# Altium PCB microphone_DIY.PcbDoc
Units mm, origin at the board's own origin, x right, y up, seen from the top; angles counter-clockwise.
Board outline 43 x 43 mm, 2 copper layers (Top Layer, Bottom Layer); 36 components, 27 nets, 131 pads, 35 vias.
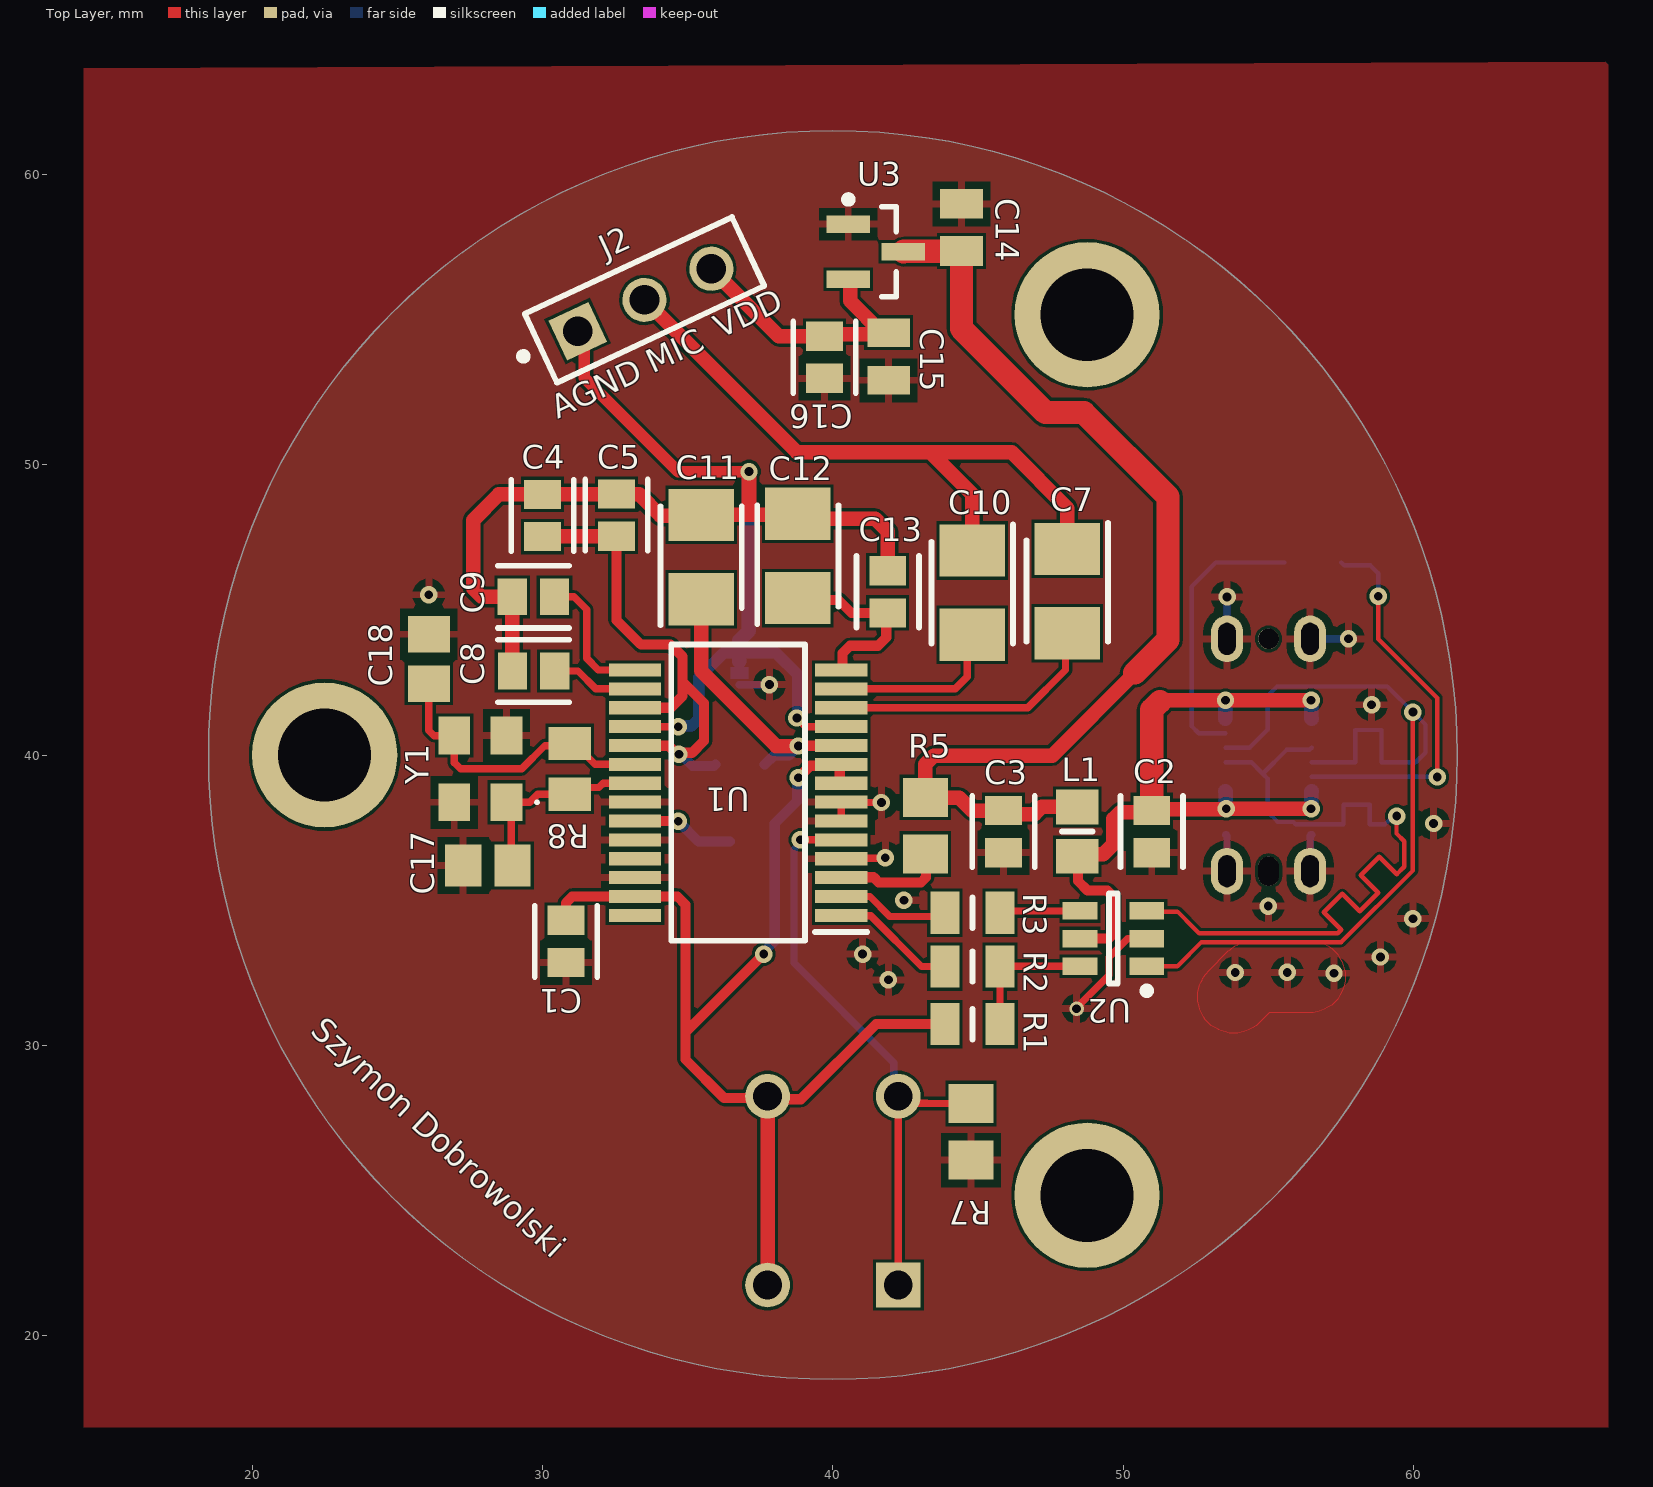
[diagram p0: Top Layer view]
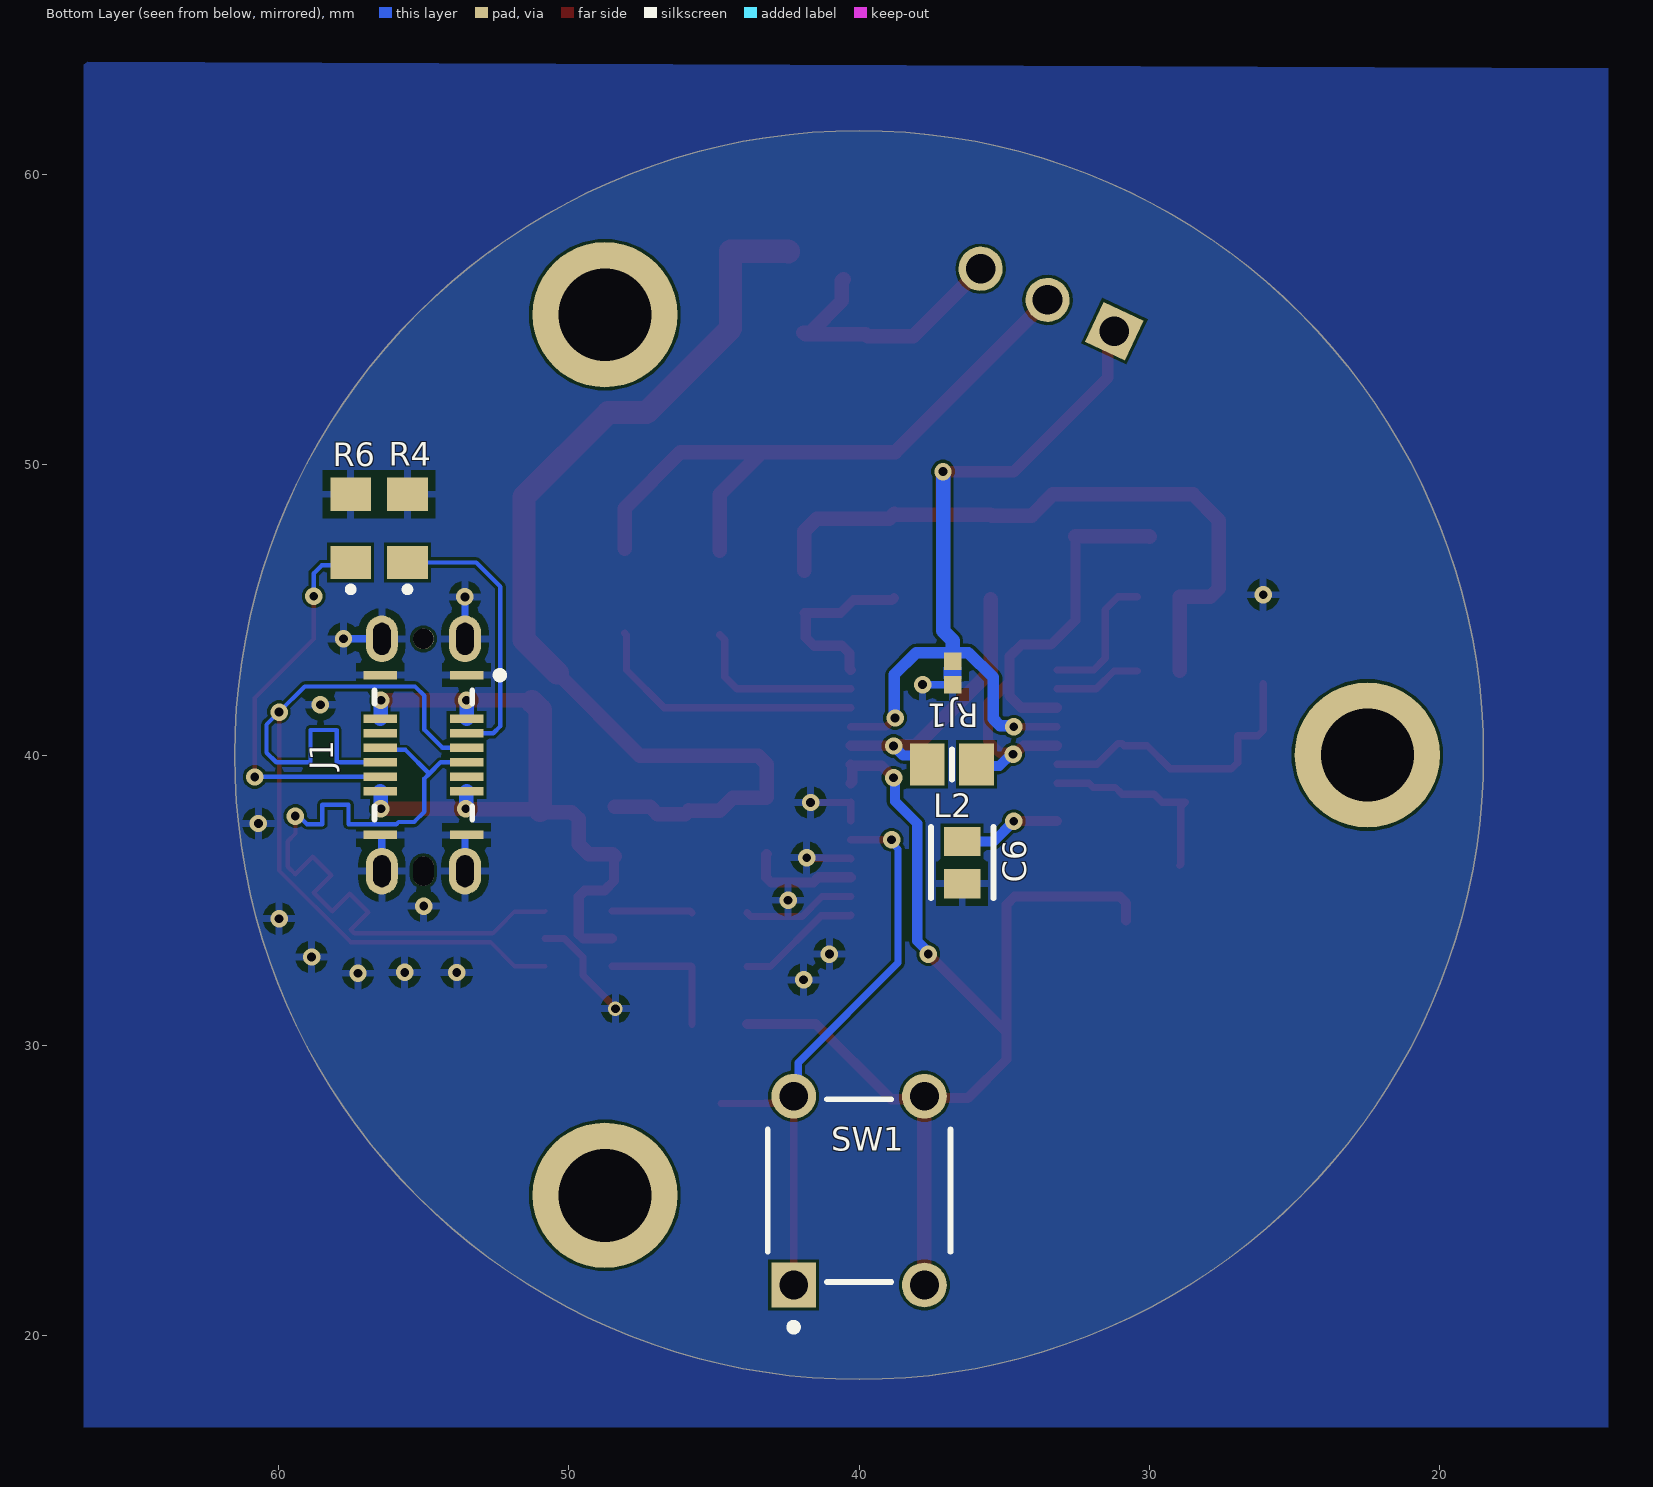
[diagram p1: Bottom Layer view, seen from below]
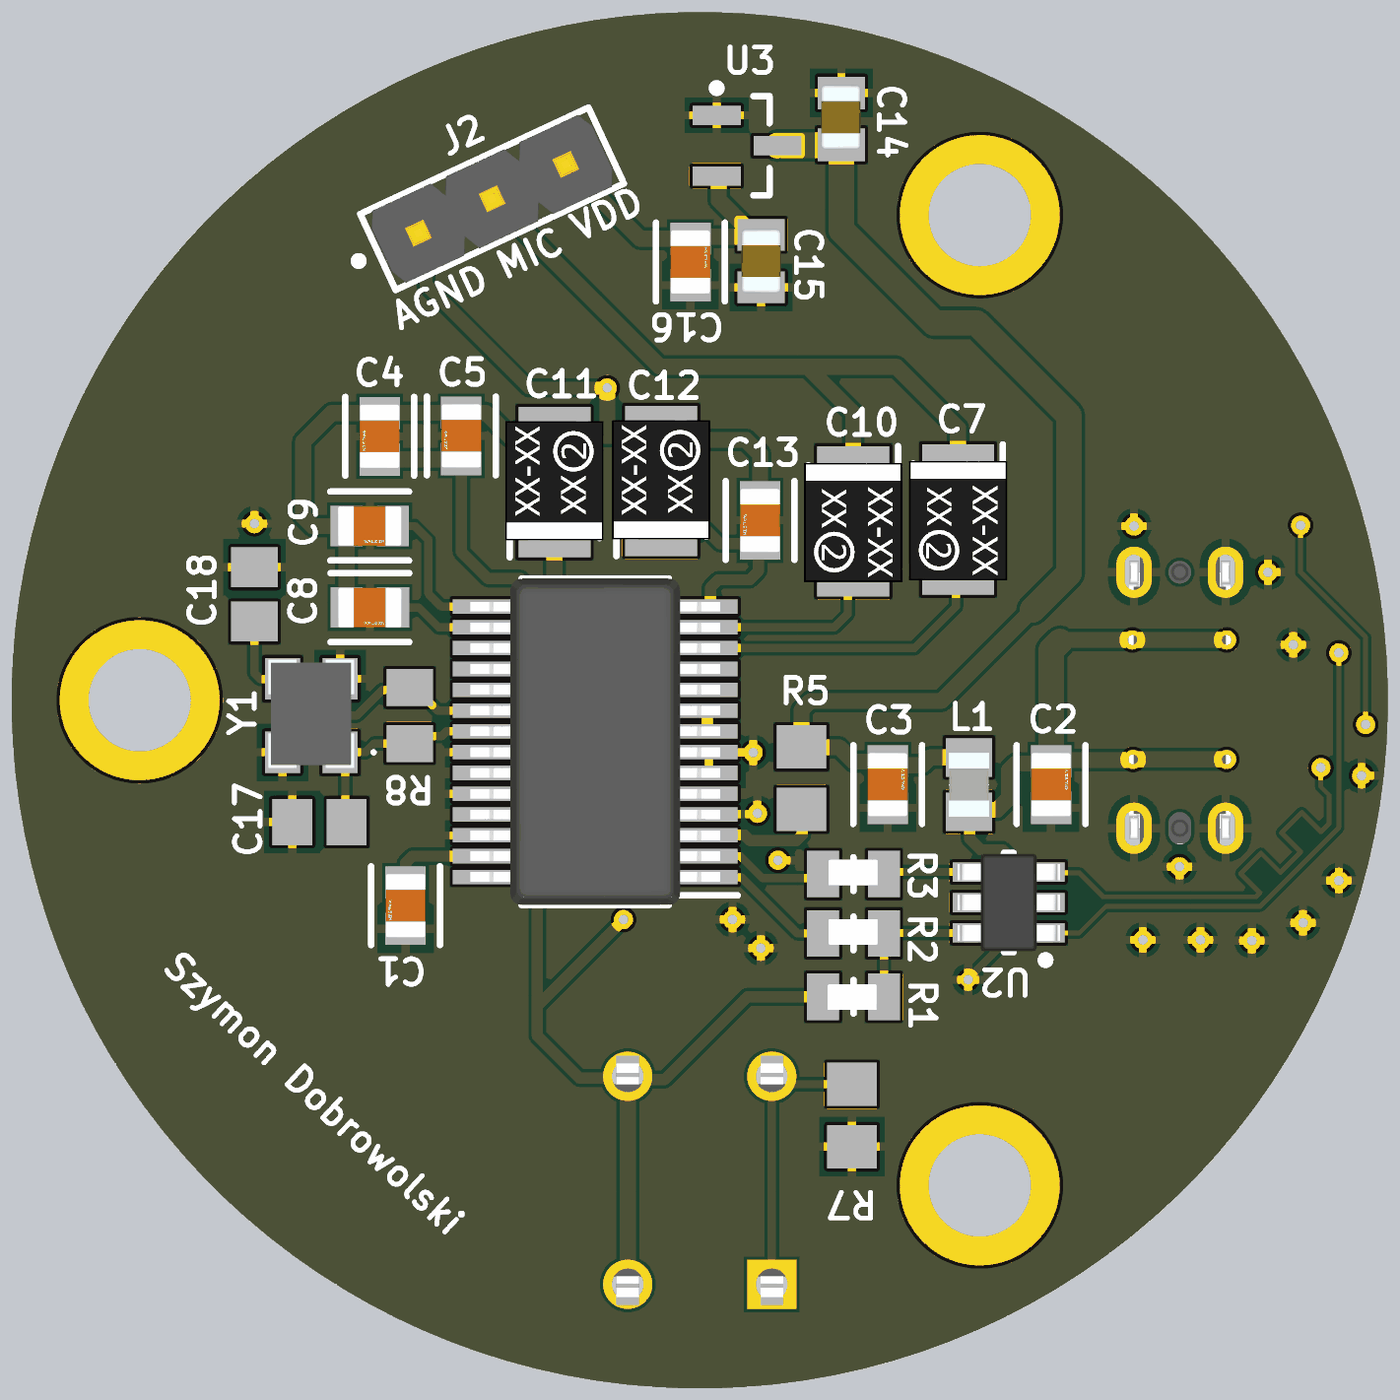
[diagram p2: 3D render of the assembled board from above, using the file's embedded part models]
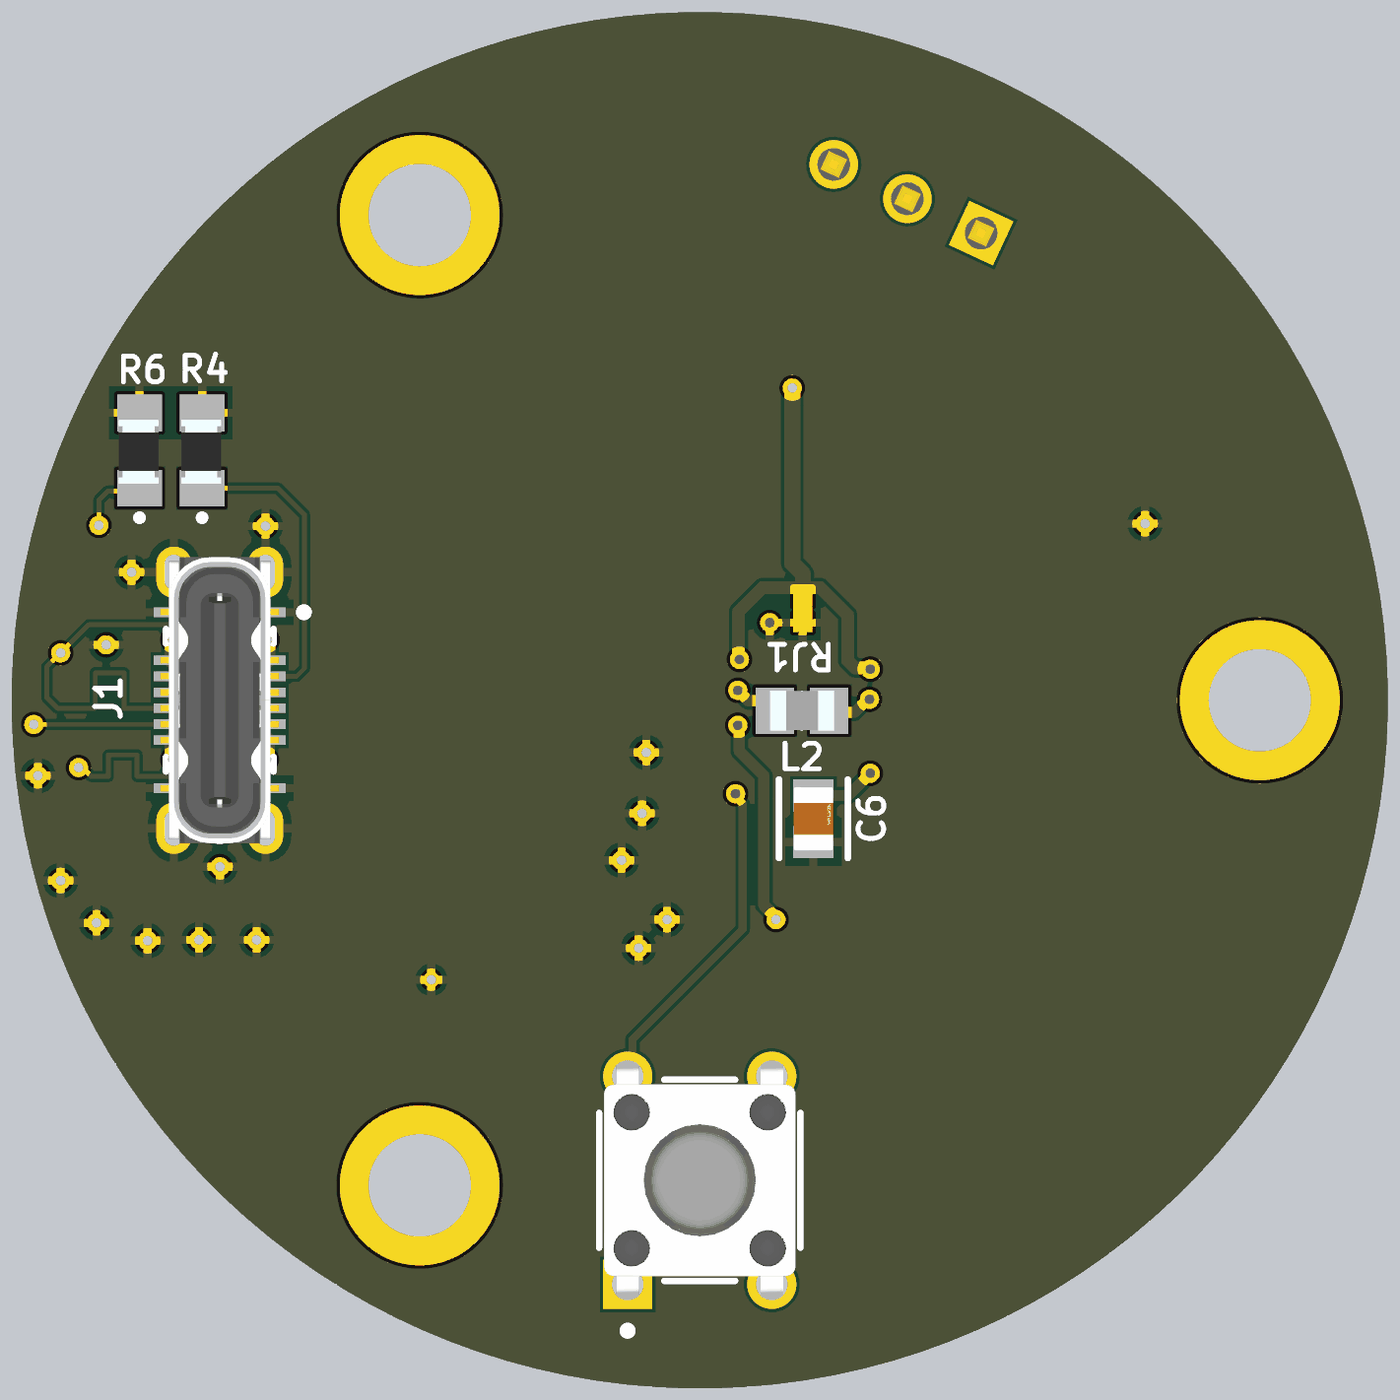
[diagram p3: 3D render of the assembled board from below, using the file's embedded part models]

## Layer stack, top to bottom
Top Solder: solder mask 0.0102, Solder Resist, Dk 3.5
Top Layer: signal copper 0.0356
Dielectric 1: dielectric 0.32, FR-4, Dk 4.8
Bottom Layer: signal copper 0.0356
Bottom Solder: solder mask 0.0102, Solder Resist, Dk 3.5

## Board outline
40,18.5 cw(c40,40) 18.5,40 cw(c40,40) 40,61.5 cw(c40,40) 61.5,40 cw(c40,40)

## Design rules (kind name [scope] priority, off if disabled: settings)
Clearance [All] p1: gap=0.1 ignorepadtopadclearanceinfootprint=TRUE
ComponentClearance [All] p1: gap=0.2 collisioncheckmode=3 verticalgap=0.2 showdistances=FALSE checkcomponentboundary=TRUE
DiffPairsRouting [InDifferentialPairClass('USB')] p1: maxlimit=0.254 minlimit=0.15 mostfreqgap=0.15 toplayer_minwidth=0.15 toplayer_maxwidth=0.25 toplayer_prefwidth=0.25 bottomlayer_minwidth=0.15 bottomlayer_maxwidth=0.25 bottomlayer_prefwidth=0.25 maxuncoupledlength=4
HoleSize [All] p1: absolutevalues=TRUE maxlimit=5.54 minlimit=0.01 maxpercent=80.000 minpercent=20.000
HoleToHoleClearance [All] p1: gap=0.01 allowstackedmicrovias=TRUE
MatchedLengths [InxSignalClass('All xSignals')] p1: tolerance=0.1 checknetsindiffpair=FALSE checkdiffpairvsdiffpair=TRUE checkxsignals=TRUE checkothers=TRUE usedelayunits=TRUE delaytolerance=10.000000 targetsourcename=USB_P-PCM_P-D_P_PP1
MinimumSolderMaskSliver [All] p1: minsoldermaskwidth=0.01
PolygonConnect [All] p1: connectstyle=Relief reliefconductorwidth=0.254 reliefentries=4 polygonreliefangle="90 Angle" airgapwidth=0.254
RoutingVias [All] p1: holewidth=0.3 width=0.5 viastyle="Through Hole" minholewidth=0.3 minwidth=0.45 maxholewidth=0.3 maxwidth=0.6
SilkToSilkClearance [All] p1: silktosilkclearance=0.01
SilkToSolderMaskClearance [IsPad] p1: minsilkscreentomaskgap=0.1 clearancetoexposedcopper=TRUE
SolderMaskExpansion [All] p1: expansion=0.102 istentingtop=FALSE
SupplyNets "Schematic Supply Nets_1" [InNet('GND')] p1: voltage=0.000
Width USB [InNetClass('USB')] p1: maxlimit=0.254 minlimit=0.15 preferedwidth=0.254
Width AUDIO [InNetClass('ANALOG')] p2: maxlimit=0.5 minlimit=0.254 preferedwidth=0.4 minimp=50.000000 maximp=50.000000 favimp=50.000000
Width PWR [InNetClass('PWR')] p3: maxlimit=0.8 minlimit=0.35 preferedwidth=0.5 minimp=50.000000 maximp=50.000000 favimp=50.000000
Width [All] p4: maxlimit=0.254 minlimit=0.15 preferedwidth=0.254 minimp=50.000000 maximp=50.000000 favimp=50.000000
23 further rules are at their usual default settings.

## Classes and differential pairs
differential pair class USB: D PCM USB
net class USB: D_N D_P PCM_N PCM_P USB_N USB_P
net class ANALOG: AGNDC NetC7_1 VINL VINR
net class PWR: LDO_OUT NetR5_2 VBUS VBUS_ESD VCCCI VCCP1I VCCXI VCOM VDDI
differential pair PCM: +PCM_P -PCM_N
differential pair D: +D_P -D_N
differential pair USB: +USB_P -USB_N

## Components (designator, comment, footprint, x,y, rotation, side; value= is the part's Value field where it differs from the comment)
C1 "0805B104K500CT" FP-0805B-IPC_C 30.808,33.581 r270 top
C2 "0805B104K500CT" FP-0805B-IPC_C 50.978,37.363 r90 top
C3 "0805B104K500CT" FP-0805B-IPC_C 45.872,37.363 r90 top
C4 "0805B104K500CT" FP-0805B-IPC_C 29.999,48.248 r270 top
C5 "0805B104K500CT" FP-0805B-IPC_C 32.549,48.26 r270 top
C6 "0805B104K500CT" FP-0805B-IPC_C 36.449,36.297 r90 bottom
C7 "593D106X9016B2TE3" 593D106X9016B2TE3-Footprint-1 48.069,45.647 r270 top value=10µF
C8 "0805B104K500CT" FP-0805B-IPC_C 29.693,42.894 r0 top
C9 "0805B104K500CT" FP-0805B-IPC_C 29.687,45.444 r0 top
C10 "593D106X9016B2TE3" 593D106X9016B2TE3-Footprint-1 44.796,45.59 r270 top value=10µF
C11 "593D106X9016B2TE3" 593D106X9016B2TE3-Footprint-1 35.462,46.817 r90 top value=10µF
C12 "593D106X9016B2TE3" 593D106X9016B2TE3-Footprint-1 38.794,46.853 r90 top value=10µF
C13 "0805B104K500CT" FP-0805B-IPC_C 41.885,45.618 r270 top
C14 "08055C105KAT2A" 08055C105KAT2A-Footprint-1 44.425,58.166 r270 top value=1µF
C15 "0805B106K100CT" 0805B106K100CT-Footprint-1 41.92,53.723 r90 top value=10µF
C16 "0805B104K500CT" FP-0805B-IPC_C 39.708,53.696 r90 top
C17 "VJ0805A120JXACW1BC" CAPC2013X135X50NL15T20 28.118,36.195 r0 top
C18 "VJ0805A120JXACW1BC" CAPC2013X135X50NL15T20 26.086,43.307 r270 top
J1 "USB4145-03-0230-C" FP-USB4145-03-0230-C-MFG 55,40 r270 bottom locked
J2 "MTLW-103-07-G-S-230" FP-MTLW-103-07-G-S-230-MFG 33.511,55.67 r25 top
L1 "MPZ2012S601ATD25" MPZ2012S601ATD25-Footprint-1 48.412,37.363 r90 top value=1mH
L2 "MPZ2012S601ATD25" MPZ2012S601ATD25-Footprint-1 36.805,39.675 r180 bottom value=100
R1 "AR05BTCW1501" AR05BTCW1501-Footprint-1 44.806,30.734 r180 top value=1.5k
R2 "CPF0805B22RE1" 2-1614884-5-Footprint-1 44.803,32.716 r180 top value=22
R3 "CPF0805B22RE1" 2-1614884-5-Footprint-1 44.803,34.569 r180 top value=22
R4 "ERJP06F5101V" ERJP06F5101V-Footprint-1 55.55,47.803 r90 bottom value=5.1k
R5 "ERJ-6GEYJ2R2V" RESC2013X70X40ML20T20 43.18,37.567 r270 top
R6 "ERJP06F5101V" ERJP06F5101V-Footprint-1 57.506,47.803 r90 bottom value=5.1k
R7 "ERJ-6ENF1002V" RESC2013X70X40ML20T20 44.755,27.026 r90 top
R8 "ERJ-6GEYJ105V" RESC2013X70X40NL20T20 30.937,39.522 r90 top
RJ1 "Net Tie 12x8mil" SHORT06-FP 36.779,42.824 r90 bottom net-tie
SW1 "1-1825910-4" FP-1-1825910-4-MFG 40,25 r0 bottom locked
U1 "PCM2906CDB" PCM2906CDB-Footprint-1 36.734,38.703 r180 top
U2 "USBLC6-2SC6" STM-SOT23-6L_V 49.655,33.68 r180 top value=2.5pF
U3 "MCP1700T-3302E/TT" SOT-23-TT3_N 41.478,57.328 r0 top
Y1 "3225-12M-SR" 3225-12M-SR-Footprint-1 27.861,39.522 r90 top

## Footprints (in the part's own frame and the unit in brackets; to place one, negate y for a bottom-side part, rotate by r counter-clockwise, add the part's x,y. Pads: shape width x height; smd on the part's side, far side on the other; paste and mask are expansions set on the pad)
2-1614884-5-Footprint-1 [mm]
  rect 1x1.45 smd: 1(-0.95,0) 2(0.95,0)
  silkscreen extent 0,-0.53 0,0.53, body extent -0.77,-0.45 0.78,0.35, height 0.45
593D106X9016B2TE3-Footprint-1 [mm]
  rect 1.8x2.25 smd: 1(-1.45,0) 2(1.45,0)
  silkscreen extent -2.35,-1.4 1.75,1.4, body extent -1.83,-1.54 1.91,1.54, height 2.15
0805B106K100CT-Footprint-1 [mm]
  rect 0.99x1.47 smd: 1(-0.82,0) 2(0.82,0)
  body extent -1,-0.63 1,0.63, height 1.45
3225-12M-SR-Footprint-1 [mm]
  rect 1.3x1.1 smd: 1(-1.15,-0.9) 2(1.15,-0.9) 3(1.15,0.9) 4(-1.15,0.9)
  silkscreen extent -1.2,-2 -1.1,-1.9, body extent -1.64,-1.34 1.74,1.34, height 0.8
08055C105KAT2A-Footprint-1 [mm]
  rect 1.02x1.47 smd: 1(-0.81,0) 2(0.81,0)
  body extent -1.06,-0.64 0.95,0.61, height 1.4
AR05BTCW1501-Footprint-1 [mm]
  rect 1x1.45 smd: 1(-0.95,0) 2(0.95,0)
  silkscreen extent 0,-0.53 0,0.53, body extent -0.73,-0.39 0.82,0.41, height 0.45
CAPC2013X135X50NL15T20 [mm] "Chip Capacitor, 2-Leads, Body 2.00x1.25mm, IPC Medium Density"
  rect 1.25x1.45 smd: 1(-0.85,0) 2(0.85,0)
  body extent -1.08,-0.7 1.07,0.7, height 1.35
ERJP06F5101V-Footprint-1 [mm]
  rect 1.15x1.4 smd: 1(-1.175,0) 2(1.175,0)
  silkscreen extent -2.2,-0.1 -2,0.1, body extent -1.04,-0.59 0.96,0.66, height 0.6
FP-1-1825910-4-MFG [mm]
  rect 1.54x1.54 hole 0.99 paste-2539.97 mask+0: 1(2.25,3.25)
  round 1.54 hole 0.99 paste-2539.97 mask+0: 2(2.25,-3.25) 3(-2.25,3.25) 4(-2.25,-3.25)
  silkscreen extent -3.15,-3.15 3.15,4.82, body extent -3,-3.9 3,3.9, height 9.8
FP-0805B-IPC_C [mm]
  rect 1.006x1.262 smd paste+0 mask+0: 1(-0.726,0) 2(0.726,0)
  silkscreen extent -1.23,-1.07 1.23,1.07, body extent -1.33,-0.77 1.33,0.77, height 0.25
FP-MTLW-103-07-G-S-230-MFG [mm]
  rect 1.52x1.52 hole 1.02 paste-2539.97 mask+0: 1(-2.54,0)
  round 1.52 hole 1.02 paste-2539.97 mask+0: 2(0,0) 3(2.54,0)
  silkscreen extent -4.72,-1.31 3.94,1.31, body extent -4.04,-1.41 4.04,1.41, height 0.25
FP-USB4145-03-0230-C-MFG [mm]
  rrect100% 1.6x1.1 hole 0.6 slot 1.1 at 0 deg paste-2539.97 mask+0: 1(-4,1.43) 2(4,1.43) 3(-4,-1.43) 4(4,-1.43)
  rect 0.3x1.15 smd paste+0 mask+0: A1(-2.75,1.485) A4(-1.25,1.485) A5(-0.75,1.485) A6(-0.25,1.485) A7(0.25,1.485) A8(0.75,1.485) A9(1.25,1.485) A12(2.75,1.485) B1(2.75,-1.485) B4(1.25,-1.485) B5(0.75,-1.485) B6(0.25,-1.485) B7(-0.25,-1.485) B8(-0.75,-1.485) B9(-1.25,-1.485) B12(-2.75,-1.485)
  round 0.71 hole 0.71 unplated paste-2539.97 mask+0: ""(-4,0)
  rrect100% 1.01x0.71 hole 0.71 slot 1.01 at 0 deg unplated paste-2539.97 mask+0: ""(4,0)
  silkscreen extent -2.87,-1.68 2.22,2.75, body extent -4.48,-1.85 4.47,1.84, height 7.66
MPZ2012S601ATD25-Footprint-1 [mm]
  rect 1.2x1.45 smd: 1(-0.85,0) 2(0.85,0)
  silkscreen extent 0,-0.53 0,0.53, body extent -1,-0.63 1,0.63, height 1.05
PCM2906CDB-Footprint-1 [mm]
  rect 1.8x0.45 smd: 1(-3.55,4.225) 2(-3.55,3.575) 3(-3.55,2.925) 4(-3.55,2.275) 5(-3.55,1.625) 6(-3.55,0.975) 7(-3.55,0.325) 8(-3.55,-0.325) 9(-3.55,-0.975) 10(-3.55,-1.625) 11(-3.55,-2.275) 12(-3.55,-2.925) 13(-3.55,-3.575) 14(-3.55,-4.225) 15(3.55,-4.225) 16(3.55,-3.575) 17(3.55,-2.925) 18(3.55,-2.275) 19(3.55,-1.625) 20(3.55,-0.975) 21(3.55,-0.325) 22(3.55,0.325) 23(3.55,0.975) 24(3.55,1.625) 25(3.55,2.275) 26(3.55,2.925) 27(3.55,3.575) 28(3.55,4.225)
  silkscreen extent -4.45,-5.1 2.3,5.1, body extent -3.9,-5.1 3.9,5.1, height 1.9
RESC2013X70X40ML20T20 [mm] "Chip Resistor, 2-Leads, Body 2.00x1.25mm, IPC Low Density"
  rect 1.35x1.55 smd: 1(-0.975,0) 2(0.975,0)
  body extent -1.1,-0.72 1.1,0.72, height 0.7
RESC2013X70X40NL20T20 [mm] "Chip Resistor, 2-Leads, Body 2.00x1.25mm, IPC Medium Density"
  rect 1.15x1.45 smd: 1(-0.875,0) 2(0.875,0)
  body extent -1.1,-0.72 1.1,0.72, height 0.7
SHORT06-FP [mm]
  rect 0.6x0.6 smd paste-0.4 mask+0.102: 1(-0.4,0) 2(0.4,0)
  Top Layer region: -0.2,0.3 -0.2,-0.3 0.2,-0.3 0.2,0.3
SOT-23-TT3_N [mm] "SOT23, 3-Leads, Body 2.9x1.3mm, Pitch 0.95mm, Lead Span 2.4mm, IPC Medium Density"
  rect 1.5x0.6 smd: 1(-0.95,0.95) 2(-0.95,-0.95) 3(0.95,0)
  silkscreen extent -1.07,-1.55 0.7,1.92, body extent -0.7,-1.52 0.7,1.53, height 1.12
STM-SOT23-6L_V [mm] "SOT23, 6-Leads, Body 3.05x1.75mm, Pitch 0.95mm"
  rect 1.2x0.6 smd: 1(-1.15,0.95) 2(-1.15,0) 3(-1.15,-0.95) 4(1.15,-0.95) 5(1.15,0) 6(1.15,0.95)
  silkscreen extent -1.28,-1.55 0.15,1.92, body extent -1.6,-1.53 1.6,1.53, height 1.45

## Part data
C1 C2 C4 C5 C6 C13 C16: library part CMP-45632-000003-1, "CAP CER 0.1UF 50V X7R 0805", Capacitance=100nF, Case Code (Imperial)=0805, Case Code (Metric)=2012, Dielectric=X7R, Max Operating Temperature=125°C, Min Operating Temperature=-55°C, Tolerance=10%, Voltage=50V, Case/Package=0805, Depth=1.25mm, Lead Free="Lead Free", Length=2mm, Packaging="Tape and Reel", Radiation Hardening=No, RoHS Compliant=Yes, Voltage Rating=50V, Voltage Rating (DC)=50V
C3 C8 C9: library part CMP-45632-000003-1, "CAP CER 0.1UF 50V X7R 0805", Capacitance=10uF, Case Code (Imperial)=0805, Case Code (Metric)=2012, Dielectric=X7R, Max Operating Temperature=125°C, Min Operating Temperature=-55°C, Tolerance=10%, Voltage=50V, Case/Package=0805, Depth=1.25mm, Lead Free="Lead Free", Length=2mm, Packaging="Tape and Reel", Radiation Hardening=No, RoHS Compliant=Yes, Voltage Rating=50V, Voltage Rating (DC)=50V
C7 C10 C11 C12: library part CMP-001-00089-1, "Cap Tant Solid 10uF 16V B CASE 10% (3.5 X 2.8 X 1.9mm) Inward L SMD 3528-21 0.8 Ohm 125C T/R", Case/Package=1411, Max Operating Temperature=125°C, Min Operating Temperature=-55°C, Ripple Current=132mA, Tolerance=10%, Voltage Rating=16V, Mounting Technology="Surface Mount", Pins=2
C14: library part CMP-001-00087-1, "0805 Standard 1UF Ceramic Multilayer Capacitor, 50V, +125C, X7R Dielectric, +/-10%", Case/Package=0805, Max Operating Temperature=125°C, Min Operating Temperature=-55°C, Tolerance=10%, Voltage Rating=50V, Mounting Technology="Surface Mount"
C15: library part CMP-001-00088-1, "10V 10uF X7R ±10% 0805 Multilayer Ceramic Capacitors MLCC - SMD/SMT ROHS", Case/Package=0805, Max Operating Temperature=125°C, Min Operating Temperature=-55°C, Mounting Technology="Surface Mount"
C17 C18: library part CMP-2007-03409-1, Manufacturer=Vitramon, Part Number=VJ0805A120JXACW1BC
J1: library part CMP-03329-129995627-1, "USB4145-03-0230-C USB Connectors USB-C Rec 3u Vert 16P SMT 2.3mm TH stakes H7.46mm T+R+Cap", Current Rating=6.25A, Max Operating Temperature=85°C, Min Operating Temperature=-25°C, Voltage Rating=48V, Contact Material="Gold, Nickel", Height=7.66mm, NexarPartId=129995627, Number of Contacts=16, USB Standard="USB 2.0"
J2: library part CMP-02766-001679-1, "CONN HEADER VERT 3POS 2.54MM", Housing Color=Black, Max Current Rating=3A, Max Operating Temperature=125°C, Min Operating Temperature=-55°C, Contact Material=Bronze, Contact Plating=Gold, Depth=2.48mm, Gender=Male, Housing Material=Polymer, Length=7.62mm, Number of Contacts=3, Number of Rows=1, Orientation=Straight, Packaging=Bulk, Pitch=2.54mm, Radiation Hardening=No, RoHS Compliant=Yes, Termination=Solder
L1 L2: library part CMP-006-00021-1, "Ferrite Beads Multi-Layer Power 600Ohm 25% 100MHz 2A 0.1Ohm DCR 0805 Automotive T/R", Case/Package=0805, Current Rating=2A, Max Operating Temperature=125°C, Min Operating Temperature=-55°C, Tolerance=25%, Max Current Rating=2A, Mounting Technology="Surface Mount"
R1: library part CMP-009-00182-1, "125mW Thin Film Resistor 100V ±25ppm/℃ ±0.1% 1.5kΩ 0805 Chip Resistor - Surface Mount ROHS", Case/Package=0805, Max Operating Temperature=155°C, Min Operating Temperature=-55°C, Tolerance=0.1%, Mounting Technology="Surface Mount"
R2 R3: library part CMP-009-00180-1, "Res Thin Film 0805 22 Ohm 0.1% 0.1W(1/10W) ±25ppm/°C Pad SMD T/R Medical", Case/Package=0805, Max Operating Temperature=155°C, Min Operating Temperature=-55°C, Tolerance=0.1%, Voltage Rating=100V, Mounting Technology="Surface Mount", Pins=2
R4 R6: library part CMP-009-00183-1, "Res Thick Film 0805 5.1K Ohm 1% 0.25W ±100ppm/°C Molded SMD Punched Carrier T/R", Case/Package=0805, Max Operating Temperature=155°C, Min Operating Temperature=-55°C, Tolerance=1%, Voltage Rating=400V, Mounting Technology="Surface Mount", Pins=2
R5: library part CMP-2001-00391-1, Manufacturer=Panasonic, Part Number=ERJ-6GEYJ2R2V
R7: library part CMP-2001-04376-1, Manufacturer=Panasonic, Part Number=ERJ-6ENF1002V
R8: library part CMP-2001-00339-1, Manufacturer=Panasonic, Part Number=ERJ-6GEYJ105V
RJ1: library part CMP-009-00121-2, Max Operating Temperature=155°C, Min Operating Temperature=-55°C, Pins=2
SW1: library part CMP-03407-000002-1, "SWITCH TACTILE SPST-NO 0.05A 24V", Contact Current Rating=50mA, Contact Resistance=100mΩ, Manufacturer="TE Connectivity", Operating Force=160gf, Temperature="-35°C to +85°C", Temperature Range High=+85°C, Temperature Range Low=-35°C, Voltage Rating Dc=24V, Automotive=No, Category=Switch, ComponentLink2Description=Datasheet, ComponentLink2URL=https://www.te.com/commerce/DocumentDelivery/DDEController?Action=showdoc&DocId=Customer+Drawing%7F1825910%7FC10%7Fpdf%7FEnglish%7FENG_CD_1825910_C10.pdf%7F1-1825910-4, Device Class L1=Electromechanical, Device Class L2=Switches, Device Class L3="Tactile Switches", Digikey Description="SWITCH TACTILE SPST-NO 0.05A 24V", Electromechanical Life=100000Cycles, Height=9.8mm, Lead Free=Yes, Manufacturer Part Number=1-1825910-4, Mount="Through Hole", Mouser Description="Tactile Switches 6MM ACTHIGH TEMP TACT SWITCH", Octopart=https://octopart.com/1-1825910-4-te+connectivity-42270468, Package=1-1825910-4, RoHS=TRUE, Throw Configuration=SPST-NO
U1: library part CMP-00024-00006-1, "Stereo USB CODEC with line out and S/PDIF, Bus-powered 28-SSOP -25 to 85", Case/Package=SSOP, Max Operating Temperature=85°C, Min Operating Temperature=-25°C, Mounting Technology="Surface Mount", Pins=28
U2: library part CMP-00000-1, "5A 17V 6V Unidirectional 5.25V SOT-23-6 ESD and Surge Protection (TVS/ESD) ROHS", Breakdown Voltage=6V, Case/Package=SOT-23, Clamping Voltage=17V, Forward Voltage=1.1V, Leakage Current=150nA, Max Junction Temperature (Tj)=125°C, Max Repetitive Reverse Voltage (Vrrm)=5.25V, Min Operating Temperature=-40°C, Peak Pulse Current=5A, Power Line Protection=Yes, Reverse Standoff Voltage=5V, Test Current=1mA, China RoHS=Compliant, Contact Plating=Tin, Data Rate=480Mbps, Depth=1.75mm, Direction=Unidirectional, Element Configuration=Dual, ESD Protection=Yes, Height=1.45mm, Lead Free="Lead Free", Length=3.05mm, Lifecycle Status=Production, Max Breakdown Voltage=6V, Max Operating Temperature=125°C, Max Reverse Leakage Current=150nA, Min Breakdown Voltage=6V, Mounting Technology="Surface Mount", Number of Bidirectional Channels=2, Number of Channels=2, Number of Elements=1, Number of Terminals=6, Operating Supply Voltage=1.1V, Peak Reverse Current=150nA, Pins=6, Polarity=Unidirectional, Radiation Hardening=No, REACH SVHC=Yes, Reverse Breakdown Voltage=6V, RoHS=Compliant, Schedule B="8536300000, 8536300000", Termination=SMD/SMT, Width=1.75mm, Working Voltage=5V
U3: library part CMP-0136-00791-1, "Low Quiescent Current LDO, 3-Pin SOT-23, Extended Temperature, Tape and Reel", Code_IPC=SOT23-3, DatasheetVersion="revB, Feb-2007", PackageDescription="3-Lead Plastic Small Outline Transistor (TT) [SOT-23]", PackageReference=SOT-23-TT3, PackageVersion="revBB, Aug-2009"
Y1: library part CMP-003-00030-1, "SMD crystal oscilator 12 MHz", Frequency=12MHz, Mounting Technology=SMD

## Free pads (board coordinates)
  round 5 hole 3.2: 1(22.5,40) 2(48.75,55.16) 3(48.75,24.84)

## Via types
v1: diameter 0.6, hole 0.3, Top Layer to Bottom Layer, 34 vias
v2: diameter 0.5, hole 0.3, Top Layer to Bottom Layer, 1 vias

## Nets (pads, with @x,y where several pads share a name; then routed paths per layer and width w, separated by ;. In a path a pad name is that pad's centre, name@x,y a point inside that pad or via, vN(x,y) a via of type N, cw(c..) or ccw(c..) an arc to the next point about the centre after c; other vN are vias at no path point)
AGNDC: C4.1 C5.1 C8.1 C9.1 C11.2 C12.2 C13.1 J2.1 RJ1.2 U1.11 U1.18 | length 50.8
  Top Layer w0.254: U1.18 33.188,40.974 34.667,40.974 v1(34.671,40.97) ; v1(38.76,41.275) 38.768,41.275 39.069,40.974 40.28,40.974 U1.11
  Top Layer w0.4: J2.1 31.443,54.362 31.443,52.987 34.671,49.759 v1(37.109,49.759)
  Top Layer w0.5: C8.1 28.964,42.897 28.964,45.441 27.903,45.441 27.61,45.734 27.61,48.082 28.502,48.974 C4.1 30.005,48.98 32.543,48.98 C5.1 32.563,48.973 33.324,48.973 34.062,48.236 35.43,48.236 C11.2 37.11,48.267 ; v1(37.109,49.759) 37.11,48.267 ; C13.1 41.885,47.701 41.453,48.133 38.964,48.133 C12.2 38.758,48.267 37.11,48.267
  Bottom Layer w0.4: v1(34.671,40.97) 34.709,41.008 35.148,41.008 35.382,41.243 35.382,42.672 36.235,43.524 36.779,43.524 38.035,43.524 38.786,42.774 38.786,41.3 v1(38.76,41.275)
  Bottom Layer w0.5: RJ1.2 36.779,43.524 36.779,43.942 37.109,44.272 v1(37.109,49.759)
D_N: R3.2 U1.2 | length 3.9
  Top Layer w0.25: U1.2 41.275,35.128 41.961,34.442 43.726,34.442 R3.2
D_P: R2.2 U1.1 | length 4.3
  Top Layer w0.25: U1.1 40.295,34.468 41.3,34.468 43.052,32.716 R2.2
GND: C1.2 C2.1 C3.1 C6.1 C14.1 C15.1 C16.1 C17.1 C18.1 J1.1 J1.2 J1.3 J1.4 J1.A1 J1.A12 J1.B1 J1.B12 R4.2 R6.2 R7.1 RJ1.1 U1.4 U1.6 U1.7 U1.22 U1.24 U1.26 U2.2 U3.1 Y1.2 Y1.4 | length 13.8
  Top Layer w0.254: U1.4 40.304,36.448 41.785,36.448 v1(41.804,36.467) ; U1.6 U1.7 40.296,38.366 v1(41.669,38.366) ; v2(48.387,31.267) 48.387,31.301 49.505,32.418 49.505,33.03 50.155,33.68 U2.2
  Bottom Layer w0.254: RJ1.1 v1(37.814,42.424) ; J1.A12 53.547,37.25 53.57,37.227 J1.2 ; J1.1 v1(53.57,45.442) ; J1.4 56.43,37.227 56.453,37.25 J1.B1 ; J1.3 v1(57.752,44)
  other v1: 41.91,32.258 57.252,32.487 53.848,32.512 55.646,32.514 58.852,33.045 41.021,33.147 59.969,34.366 54.991,34.798 42.443,35.001 60.681,37.643 58.547,41.732 26.086,45.517
HID0: R7.2 SW1.1 SW1.2 U1.5 | length 20.9
  Top Layer w0.254: v1(38.882,37.078) U1.5 ; SW1.1 SW1.2 42.496,28.004 43.239,28.004 43.242,28.001 R7.2
  Bottom Layer w0.254: v1(38.882,37.078) 38.882,36.985 38.659,36.762 38.659,32.842 42.1,29.401 42.1,28.4 SW1.2
LDO_OUT: C15.2 C16.2 J2.3 U3.2 | length 9.7
  Top Layer w0.5: J2.3 38.135,54.422 C16.2 39.769,54.482 41.859,54.482 C15.2 41.68,54.543 40.589,55.633 40.589,56.328 40.539,56.378 U3.2
NetC7_1: C7.1 C10.1 J2.2 | length 22.9
  Top Layer w0.5: J2.2 38.762,50.419 43.358,50.419 ; C10.1 44.796,48.981 43.358,50.419 ; C7.1 48.069,48.502 46.152,50.419 43.358,50.419
NetJ1_A5: J1.A5 R4.1 | length 9.6
  Bottom Layer w0.15: J1.A5 52.595,40.75 52.349,40.996 52.349,45.796 53.181,46.628 R4.1
NetJ1_B5: J1.B5 R6.1 | length 13.6
  Top Layer w0.15: v1(58.776,45.466) 58.776,43.993 60.808,41.961 v1(60.808,39.243)
  Bottom Layer w0.15: J1.B5 56.488,39.247 60.804,39.247 v1(60.808,39.243) ; R6.1 57.601,46.533 58.496,46.533 58.776,46.253 v1(58.776,45.466)
NetR5_2: R5.2 U1.3 | length 3.9
  Top Layer w0.35: U1.3 40.295,35.789 41.402,35.789 41.577,35.613 43.03,35.613 43.205,35.789 43.205,36.566 R5.2
PCM_N: R3.1 U2.4 | length 2.8
  Top Layer w0.25: R3.1 45.814,34.63 U2.4
PCM_P: R1.1 R2.1 U2.6 | length 4.7
  Top Layer w0.25: R1.1 45.756,32.714 R2.1 45.767,32.73 U2.6
USB_N: J1.A7 J1.B7 U2.3 | length 26.4
  Top Layer w0.15: U2.3 50.827,34.608 51.861,34.608 52.451,34.018 52.611,33.858 57.381,33.858 57.452,33.929 57.505,33.982 56.902,34.585 57.539,35.221 58.141,34.618 58.778,35.255 58.175,35.857 58.811,36.494 59.411,35.894 59.474,35.957 59.564,36.047 59.617,36.1 59.669,36.153 59.669,37.03 59.403,37.297 59.403,37.889 v1(59.411,37.897)
  Bottom Layer w0.15: J1.A7 54.408,39.75 54.8,39.357 ; J1.B7 56.41,40.175 55.618,40.175 54.8,39.357 ; v1(59.411,37.897) 59.289,37.897 59.009,37.617 58.933,37.617 58.482,37.617 58.482,38.29 57.582,38.29 57.582,37.617 57.507,37.617 55.931,37.617 55.855,37.694 55.321,37.694 54.966,38.049 54.966,39.192 54.8,39.357
USB_P: J1.A6 J1.B6 U2.1 | length 32.2
  Top Layer w0.15: U2.1 50.807,32.728 51.861,32.728 52.691,33.558 57.505,33.558 59.969,36.022 v1(59.969,41.478)
  Bottom Layer w0.15: J1.A6 54.347,40.25 54.966,40.869 54.966,42.037 55.288,42.36 59.088,42.36 v1(59.969,41.478) 60.401,41.046 60.401,40.081 60.07,39.75 59.482,39.75 58.889,39.75 58.889,40.86 57.989,40.86 57.989,39.75 57.914,39.75 J1.B6
VBUS: C3.2 C14.2 L1.2 R5.1 U3.3 | length 36
  Top Layer w0.5: L1.2 47.193,38.213 46.947,37.968 45.994,37.968 C3.2 45.867,38.084 44.797,38.084 44.35,38.532 43.19,38.532 R5.1 43.18,39.687 43.473,39.98 47.549,39.98 50.394,42.824
  Top Layer w0.8: U3.3 42.442,57.342 44.411,57.342 C14.2 44.425,54.686 47.32,51.791 48.641,51.791 51.537,48.895 51.537,43.967 50.394,42.824
VBUS_ESD: C2.2 J1.A4 J1.A9 J1.B4 J1.B9 L1.1 U2.5 | length 25.6
  Top Layer w0.35: L1.1 48.438,36.488 48.438,35.662 48.769,35.33 49.45,35.33 49.655,35.125 49.655,33.83 49.505,33.68 U2.5
  Top Layer w0.5: L1.1 48.475,36.576 49.301,36.576 49.657,36.932 49.657,37.797 49.886,38.026 50.914,38.026 C2.2 51.02,38.132 53.524,38.132 v1(53.543,38.151) v1(56.464,38.151) ; 51.257,41.834 51.308,41.885 v1(53.518,41.885) v1(56.464,41.885)
  Top Layer w0.8: C2.2 50.978,41.554 51.257,41.834
  Bottom Layer w0.5: J1.A9 53.529,38.736 53.529,38.165 v1(53.543,38.151) ; J1.A4 53.516,41.251 53.516,41.883 v1(53.518,41.885) ; v1(56.464,38.151) 56.475,38.161 56.475,38.74 J1.B4 ; v1(56.464,41.885) 56.475,41.874 56.475,41.26 J1.B9
VCCCI: C11.1 L2.1 U1.10 | length 9.8
  Top Layer w0.35: v1(38.811,40.31) 38.82,40.319 40.275,40.319 U1.10
  Top Layer w0.5: C11.1 35.458,45.364 35.458,42.901 38.049,40.31 v1(38.811,40.31)
  Bottom Layer w0.35: L2.1 37.959,39.98 38.481,39.98 v1(38.811,40.31)
VCCP1I: C4.2 C5.2 L2.2 U1.17 U1.19 | length 17.9
  Top Layer w0.35: C5.2 32.549,44.641 33.387,43.803 34.403,43.803 34.823,43.383 34.823,42.516 ; U1.19 33.195,40.318 34.341,40.318 34.629,40.03 v1(34.696,40.03) 34.744,40.078 35.151,40.078 35.56,40.488 35.56,41.78 34.823,42.516 ; U1.17 34.417,41.628 34.823,42.035 34.823,42.516
  Top Layer w0.5: C4.2 30.005,47.528 32.543,47.528 C5.2
  Bottom Layer w0.35: v1(34.696,40.03) 34.764,40.03 35.17,39.624 35.904,39.624 L2.2
VCCXI: C6.2 U1.23 | length 3.6
  Top Layer w0.35: U1.23 33.189,37.724 34.666,37.724 v1(34.671,37.719)
  Bottom Layer w0.35: v1(34.671,37.719) 35.367,37.023 C6.2
VCOM: C12.1 C13.2 U1.14 | length 6.5
  Top Layer w0.35: C12.1 38.862,45.336 40.194,45.336 40.638,44.892 C13.2 41.834,44.842 41.834,44.044 41.554,43.764 40.589,43.764 40.335,43.51 40.335,42.978 U1.14
VDDI: C1.1 R1.2 SW1.3 SW1.4 U1.8 U1.9 U1.27 | length 40
  Top Layer w0.35: C1.1 30.808,34.91 31.026,35.128 U1.27 34.646,35.128 34.925,34.849 34.925,30.54 ; v1(37.617,33.147) 35.011,30.54 34.925,30.54 ; v1(38.811,39.218) 39.222,39.628 U1.9@40.234,39.628 ; U1.8 40.234,39.078 U1.9@40.234,39.628 ; U1.9 U1.9@40.234,39.628 ; R1.2 41.484,30.734 38.895,28.145 37.855,28.145 SW1.4 37.694,28.194 36.246,28.194 34.925,29.515 34.925,30.54
  Top Layer w0.5: SW1.3 SW1.4
  Bottom Layer w0.35: v1(37.617,33.147) 37.617,33.215 37.998,33.596 37.998,37.643 38.763,38.408 38.763,39.17 v1(38.811,39.218)
VINL: C7.2 U1.12 | length 9.6
  Top Layer w0.254: U1.12 46.708,41.628 48.006,42.926 48.006,44.134 C7.2
VINR: C10.2 U1.13 | length 6
  Top Layer w0.254: U1.13 44.209,42.278 44.628,42.697 44.628,43.973 C10.2
VOUTL: C8.2 U1.16 | length 3
  Top Layer w0.254: C8.2 31.223,42.894 31.839,42.278 U1.16
VOUTR: C9.2 U1.15 | length 4.8
  Top Layer w0.254: C9.2 31.086,45.444 31.521,45.009 31.521,43.332 31.926,42.928 U1.15
X_IN: C17.2 R8.1 U1.21 Y1.1 | length 7
  Top Layer w0.254: C17.2 28.923,36.24 28.923,38.21 Y1.1 29.559,38.372 29.834,38.647 R8.1 31.169,38.879 31.937,38.879 32.086,39.028 U1.21
X_OUT: C18.2 R8.2 U1.20 Y1.3 | length 10.5
  Top Layer w0.254: C18.2 26.086,40.843 26.264,40.665 26.954,40.665 Y1.3 26.961,39.74 27.178,39.522 29.283,39.522 30.086,40.325 30.865,40.325 R8.2 31.087,40.397 31.806,39.678 U1.20
pads on no net: J1. J1.A8 J1.B8 U1.25 U1.28

## Polygon pours and split planes (outlines as drawn)
GND on Top Layer "Top Layer-GND 1" (solid, pour order 13): 270 vertices, not listed, extent 39.31,30.494 47.646,39.665
GND on Top Layer "GND_L01_P000" (solid, pour order 0): 14.2,63.65 14.2,16.85 66.7,16.85 66.7,63.875
GND on Top Layer "Top Layer-GND" (solid, pour order 12): 56.47,33.609 56.543,33.609 56.613,33.59 56.686,33.58 56.753,33.552 56.824,33.533 56.92,33.494 57.03,33.43 57.171,33.348 57.172,33.348 57.274,33.245 57.377,33.143 57.454,33.011 57.523,32.891 57.562,32.795 57.607,32.628 57.638,32.514 57.638,32.368 57.638,32.223 57.597,32.072 57.562,31.942 57.523,31.846 57.459,31.736 57.377,31.594 57.274,31.491 57.172,31.388 57.171,31.388 57.039,31.312 56.92,31.243 56.824,31.203 56.753,31.184 56.686,31.156 56.613,31.147 56.543,31.128 56.47,31.128 56.397,31.118 55.02,31.118 54.684,30.782 54.626,30.738 54.574,30.686 54.511,30.65 54.453,30.605 54.385,30.577 54.322,30.541 54.227,30.501 54.121,30.473 53.945,30.426 53.655,30.426 53.504,30.466 53.373,30.501 53.278,30.541 53.26,30.551 53.026,30.686 52.923,30.789 52.82,30.892 52.771,30.978 52.675,31.144 52.635,31.24 52.607,31.345 52.56,31.521 52.56,31.812 52.6,31.962 52.635,32.093 52.675,32.188 52.711,32.252 52.739,32.319 52.784,32.377 52.82,32.44 52.872,32.492 52.916,32.55 53.618,33.252 53.676,33.297 53.728,33.348 53.791,33.385 53.849,33.429 53.917,33.457 53.918,33.458 53.98,33.494 54.062,33.528 54.076,33.533 54.146,33.552 54.214,33.58 54.286,33.59 54.297,33.593 54.357,33.609 54.43,33.609 54.502,33.618 56.397,33.618
GND on Bottom Layer "GND_L02_P001" (solid, pour order 1): 14.2,63.65 14.2,16.85 66.7,16.85 66.7,63.875 66.594,63.875
GND on Bottom Layer "Bottom Layer-GND" (solid, pour order 11): 266 vertices, not listed, extent 55.646,31.118 60.762,39.645

## Silkscreen, mask and mechanical layers (free items; w line width, h text height)
Top Overlay:
  text "VDD" at 36.141,54.327 h0.8 r25
  text "MIC" at 33.804,53.133 h0.8 r25
  text "AGND" at 30.527,51.558 h0.8 r25
  text "Szymon Dobrowolski" at 21.971,30.455 h0.8 r316.93
Mechanical 1:
  circle w0.254: c40,40 r21.5